# Altium PCB Battery Fan Board_March 27.PcbDoc
Units mm, origin at the board's own origin, x right, y up, seen from the top; angles counter-clockwise.
Board outline 32.51 x 33.27 mm, 2 copper layers (Top Layer, Bottom Layer); 7 components, 2 nets, 22 pads, 0 vias.
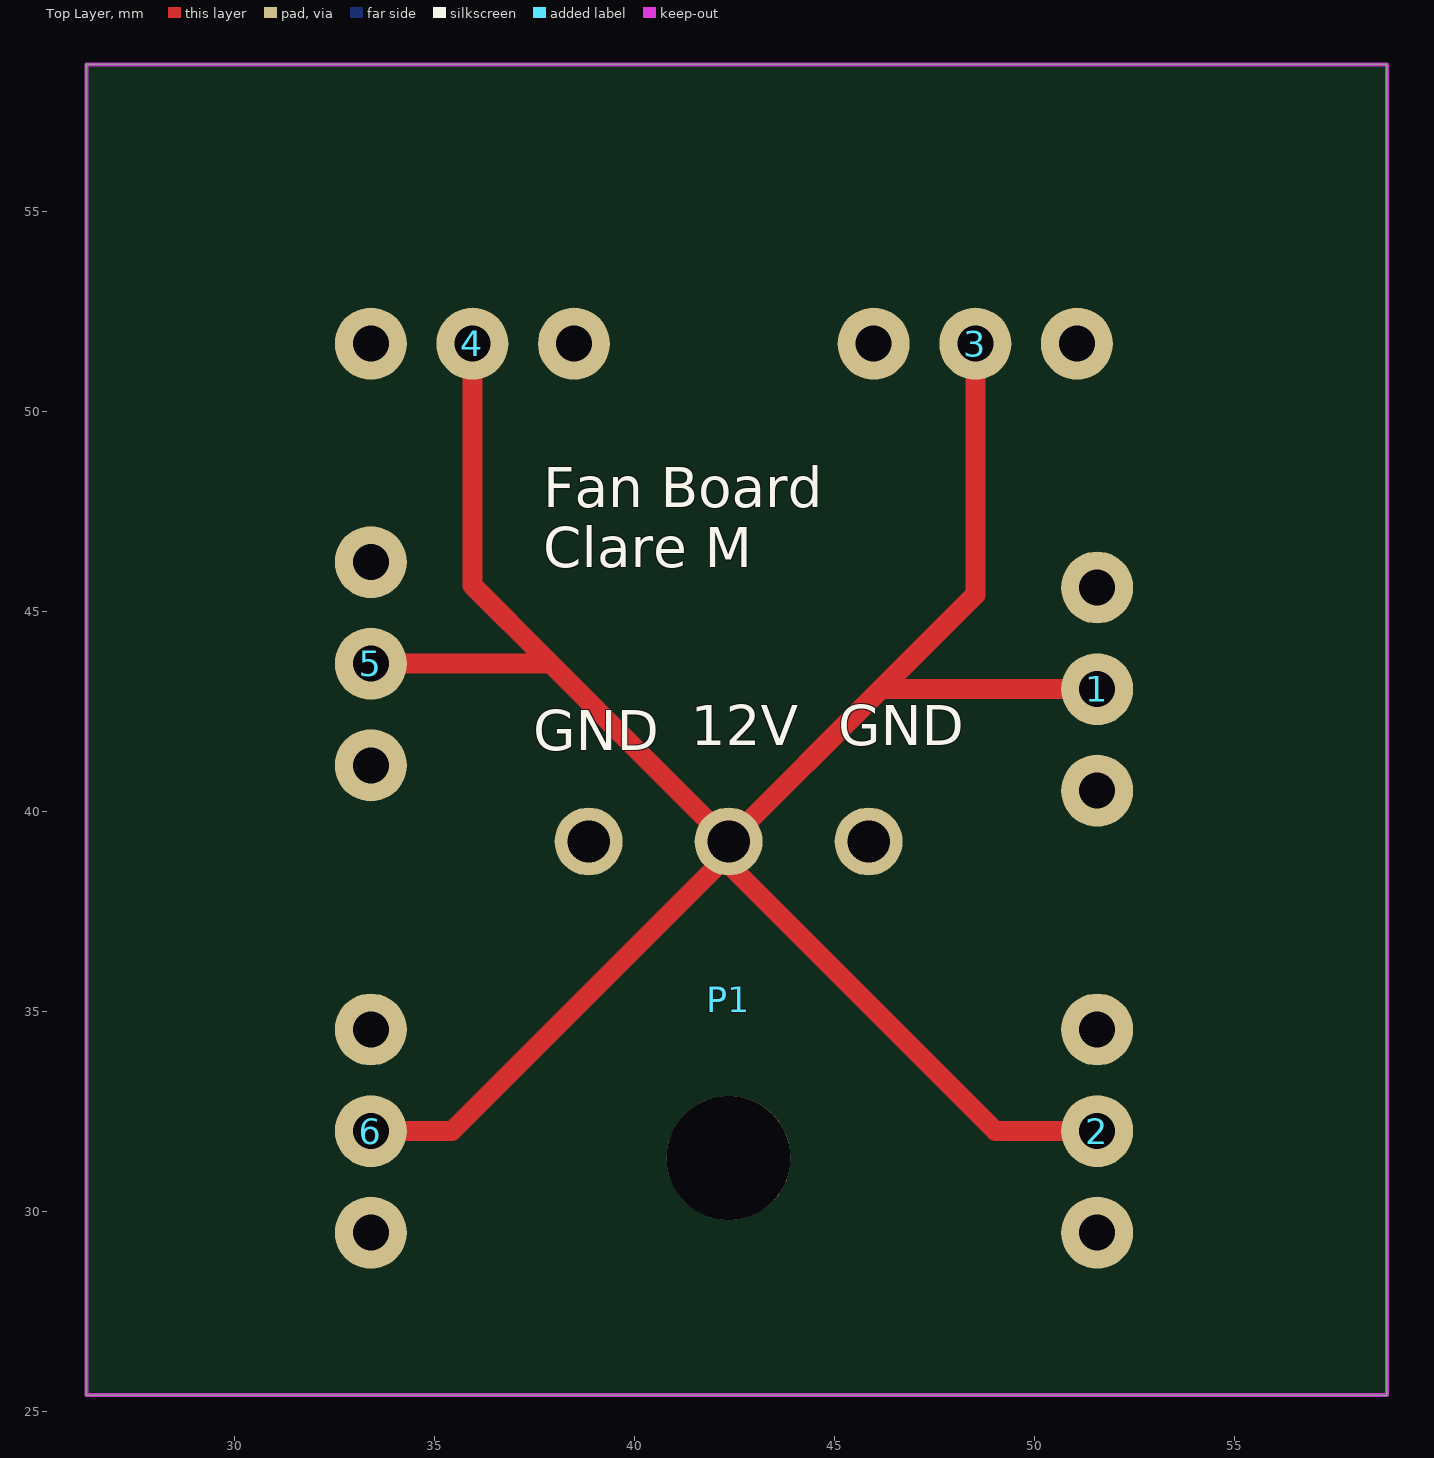
[diagram p0: Top Layer view]
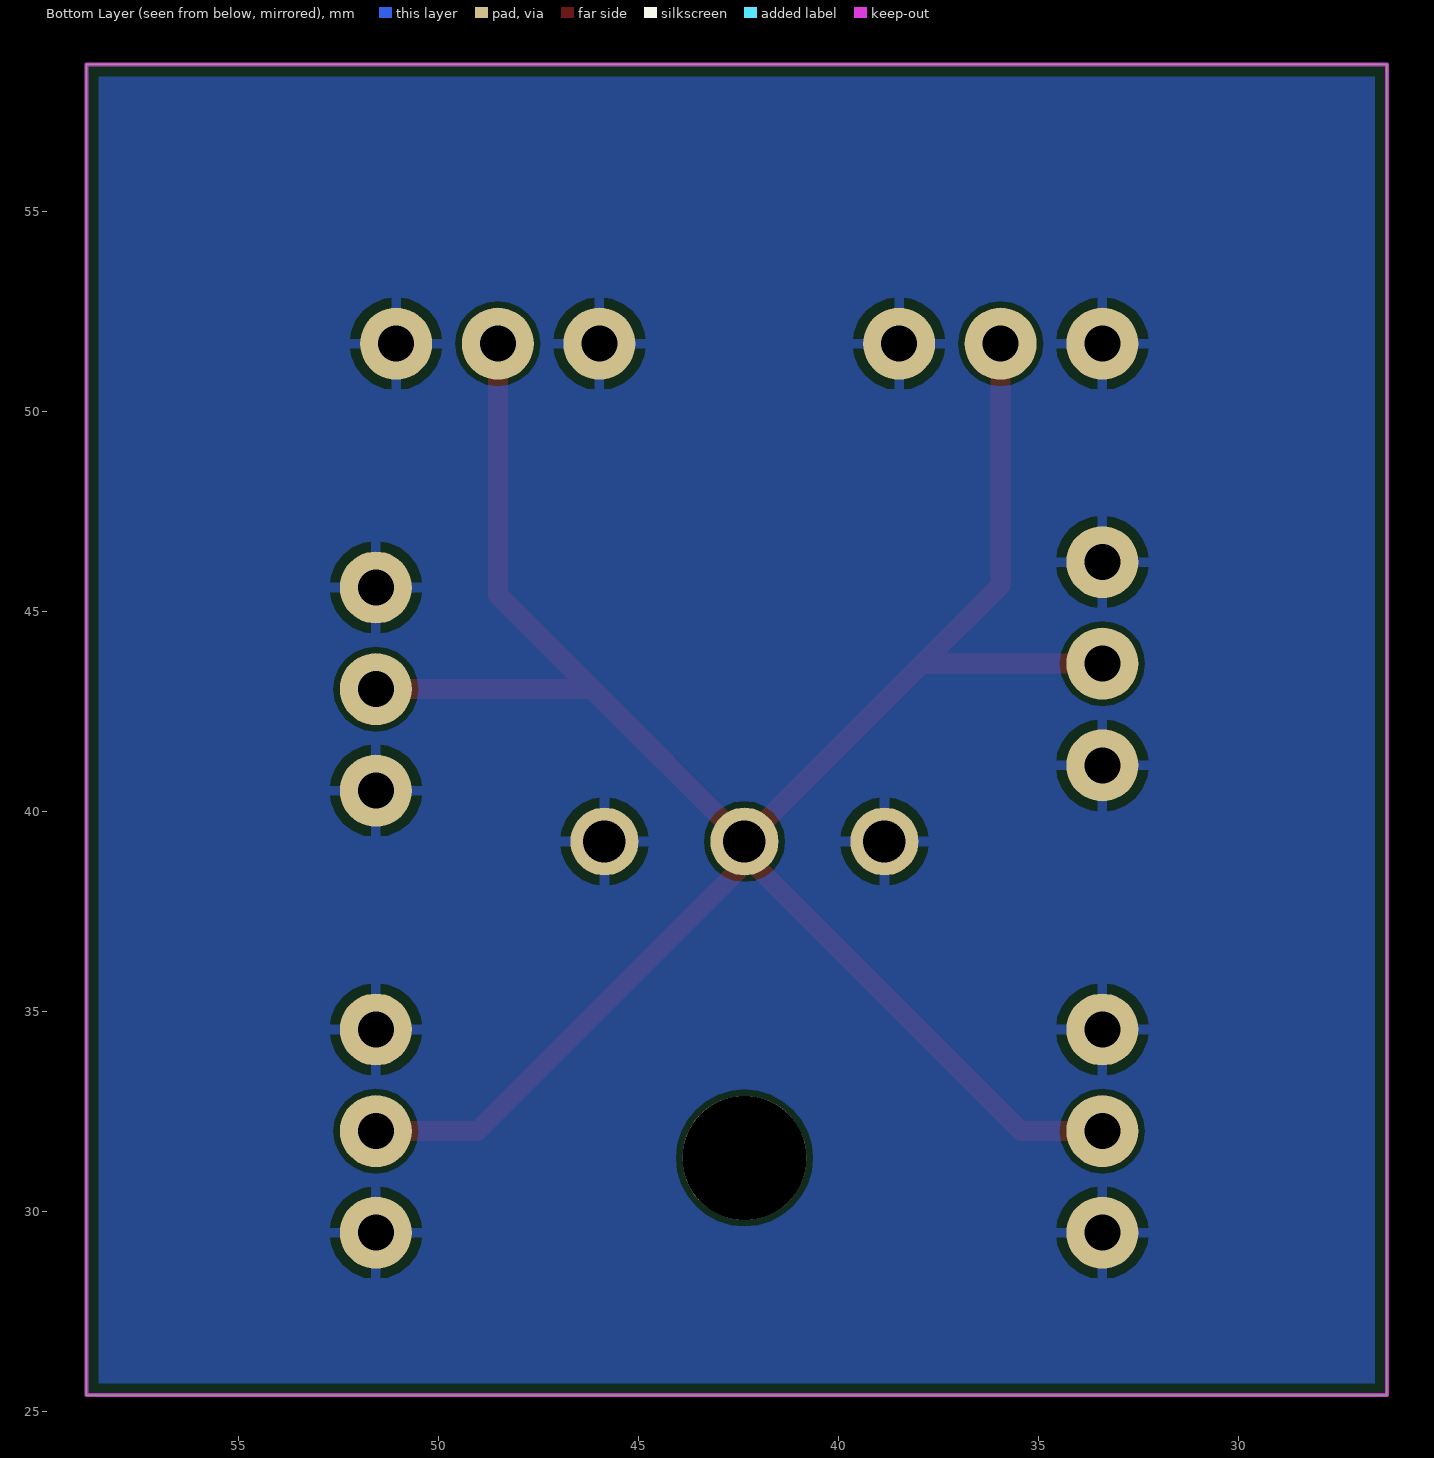
[diagram p1: Bottom Layer view, seen from below]

## Layer stack, top to bottom
Top Solder: solder mask 0.0102, Solder Resist, Dk 3.5
Top Layer: signal copper 0.0356
Dielectric 1: dielectric 0.32, FR-4, Dk 4.8
Bottom Layer: signal copper 0.0356
Bottom Solder: solder mask 0.0102, Solder Resist, Dk 3.5

## Board outline
26.289,25.4 58.801,25.4 58.801,58.674 26.289,58.674

## Design rules (kind name [scope] priority, off if disabled: settings)
BoardOutlineClearance [All] p1: gap=0.3 ignorepadtopadclearanceinfootprint=FALSE
Clearance [All] p1: gap=0.152 ignorepadtopadclearanceinfootprint=FALSE except(0: Arc-Hole Track-Hole SMDPad-Hole THPad-Hole Via-Hole Fill-Hole Poly-Hole Region-Hole Text-Hole)
ComponentClearance [All] p1: gap=0.1 collisioncheckmode=3 verticalgap=0.254 showdistances=FALSE
FabricationTestPointUsage TestPointUsage [All] p1: valid=0 allowmultiple=FALSE
FabricationTestpoint Testpoint [All] p1: side=3 testpointundercomponent=TRUE minsize=1.016 maxsize=2.54 preferedsize=1.524 minholesize=0 maxholesize=1.016 preferedholesize=0.813 testpointgrid=0.025 allowsidetop=TRUE allowsidebottom=TRUE usegrid=TRUE gridtolerance=0
HoleSize [All] p1: absolutevalues=TRUE maxlimit=6.3 minlimit=0.3 maxpercent=80.000 minpercent=20.000
HoleToHoleClearance [All] p1: gap=0.45 allowstackedmicrovias=TRUE
MinimumAnnularRing [All] p1: minimumring=0.15
MinimumSolderMaskSliver [All] p1: minsoldermaskwidth=0.075
PlaneClearance [All] p1: clearance=0.5
PlaneConnect [All] p1: planeconnectstyle=Direct reliefexpansion=0.508 reliefentries=4 reliefconductorwidth=0.254 reliefairgap=0.254
PolygonConnect "GND Via" [isVia AND InNet('GND')] p1: connectstyle=Direct reliefconductorwidth=0.254 reliefentries=4 polygonreliefangle="90 Angle" airgapwidth=0.254 // GND Via Connection
PolygonConnect [All] p2: connectstyle=Relief reliefconductorwidth=0.254 reliefentries=4 polygonreliefangle="90 Angle" airgapwidth=0.25
RoutingVias [All] p1: holewidth=0.3 width=0.6 viastyle="Through Hole" minholewidth=0.3 minwidth=0.6 maxholewidth=6.3 maxwidth=6.6
SilkToSilkClearance [All] p1: silktosilkclearance=0.15
SilkToSolderMaskClearance SilkscreenOverComponentPads [IsPad] p1: minsilkscreentomaskgap=0.25 clearancetoexposedcopper=TRUE
SolderMaskExpansion [All] p1: expansion=0.1
Width [All] p1: maxlimit=2 minlimit=0.152 preferedwidth=0.25 minimp=50.000000 maximp=50.000000 favimp=50.000000
20 further rules are at their usual default settings.

## Components (designator, comment, footprint, x,y, rotation, side; value= is the part's Value field where it differs from the comment)
1 "3 Pin 100 mil Horizontal Header" "3 Pin 100 mil Horizontal Header" 35.052,60.96 r0 top
2 "3 Pin 100 mil Horizontal Header" "3 Pin 100 mil Horizontal Header" 35.052,49.911 r0 top
3 "3 Pin 100 mil Horizontal Header" "3 Pin 100 mil Horizontal Header" 30.607,35.179 r90 top
4 "3 Pin 100 mil Horizontal Header" "3 Pin 100 mil Horizontal Header" 18.034,35.179 r90 top
5 "3 Pin 100 mil Horizontal Header" "3 Pin 100 mil Horizontal Header" 49.911,25.781 r180 top
6 "3 Pin 100 mil Horizontal Header" "3 Pin 100 mil Horizontal Header" 49.911,14.097 r180 top
P1 "Molex Ultrafit 3x1" Molex-Ultrafit-3x1 42.347,31.333 r0 top

## Footprints (in the part's own frame and the unit in brackets; to place one, negate y for a bottom-side part, rotate by r counter-clockwise, add the part's x,y. Pads: shape width x height; smd on the part's side, far side on the other; paste and mask are expansions set on the pad)
"3 Pin 100 mil Horizontal Header" [mm]
  round 1.8 hole 0.9: 1(16.51,-15.367) 2(16.51,-17.907) 3(16.51,-20.447)
  body extent 16.31,-22.99 23.51,-12.83, height 6
Molex-Ultrafit-3x1 [mm] "Molex Ultrafit 3x1 - 172310-1303"
  round 3.1 hole 3.1 unplated: 0(0,0)
  round 1.7 hole 1.06: 1(-3.5,7.91) 2(0,7.91) 3(3.5,7.91)
  body extent -6.25,-7.33 6.25,8.3, height 8.96

## Part data
P1: library part Molex-Ultrafit-3x1, "Molex Ultrafit 3x1 - 172310-1303"

## Nets (pads, with @x,y where several pads share a name; then routed paths per layer and width w, separated by ;. In a path a pad name is that pad's centre, name@x,y a point inside that pad or via, vN(x,y) a via of type N, cw(c..) or ccw(c..) an arc to the next point about the centre after c; other vN are vias at no path point)
12V: 1.2 2.2 3.2 4.2 5.2 6.2 P1.2 | length 64.3
  Top Layer w0.5: 6.2 35.433,32.004 P1.2@42.347,38.918 ; 5.2 37.79,43.688 37.846,43.744 ; 4.2 35.941,45.649 37.846,43.744 ; 3.2 48.514,45.41 46.228,43.124 ; 2.2 49.022,32.004 42.347,38.679 P1.2@42.347,38.918 ; 1.2 46.299,43.053 46.228,43.124 ; 37.846,43.744 P1.2 ; P1.2@42.347,38.918 P1.2 ; P1.2 46.228,43.124
GND: 1.1 1.3 2.1 2.3 3.1 3.3 4.1 4.3 5.1 5.3 6.1 6.3 P1.1 P1.3
pads on no net: P1.0

## Polygon pours and split planes (outlines as drawn)
GND on Bottom Layer "Bottom Layer Ground" (solid, pour order 2): 23.495,60.452 62.484,60.452 62.484,22.86 62.23,22.606 22.606,22.606

## Keep-outs
Keep-Out Layer:
  the board outline again, w0.1

## Silkscreen, mask and mechanical layers (free items; w line width, h text height)
Top Overlay:
  text "Fan Board  / Clare M" at 37.719,46.101 h1
  text "12V" at 41.402,41.656 h1
  text "GND" at 45.085,41.656 h1
  text "GND" at 37.465,41.529 h1